# Altium PCB HotBed-24V.PcbDoc (part 3 of 3)
Units mil, origin at the board's own origin, x right, y up, seen from the top; angles counter-clockwise.
Board outline 5171.49 x 4724.57 mil, 2 copper layers (Top Layer, Bottom Layer); 4 components, 1 nets, 12 pads, 0 vias.
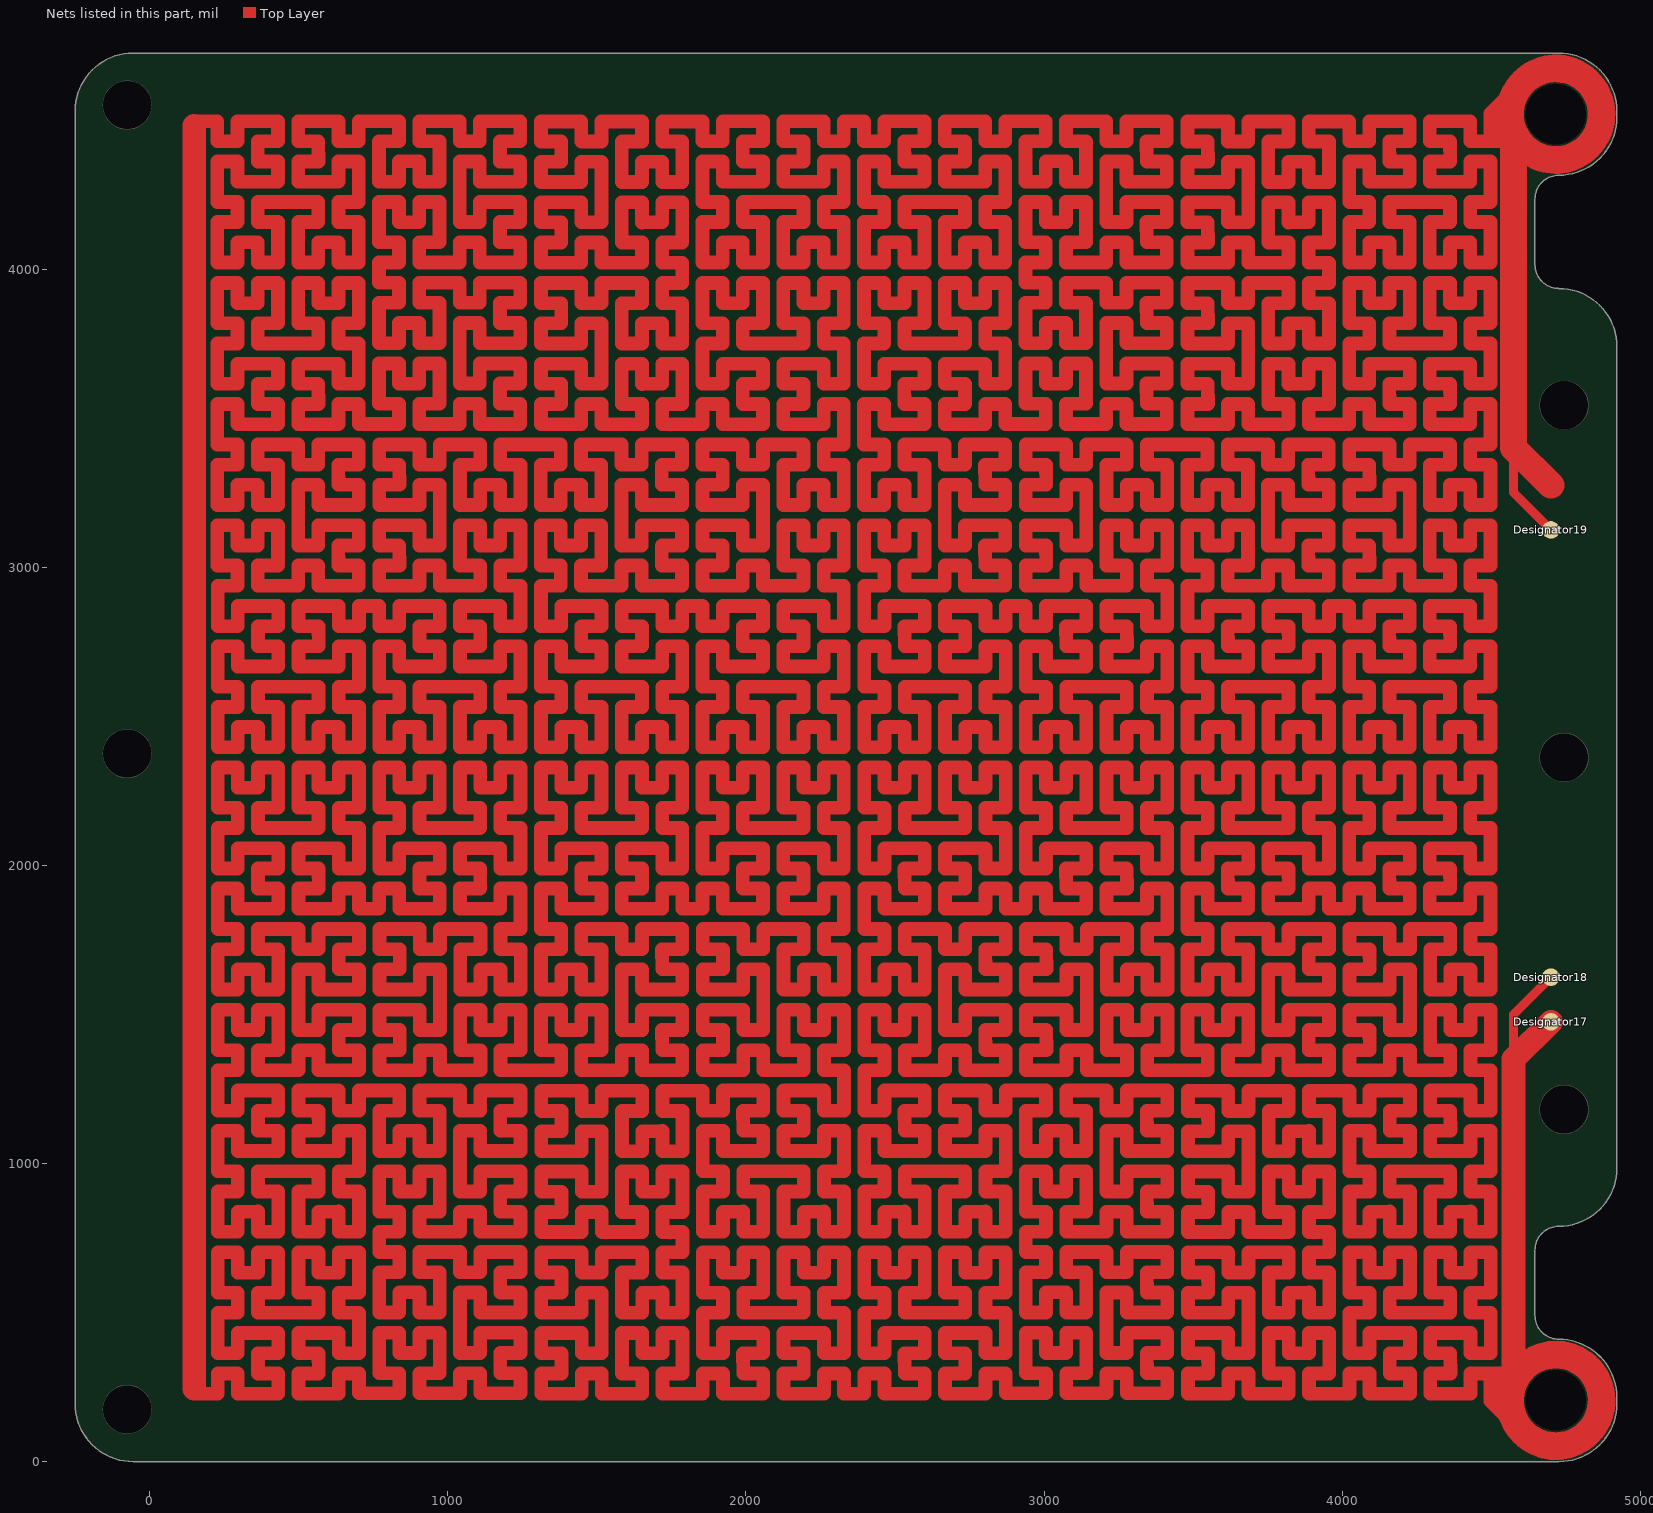
[diagram p3: the nets of this part, all layers, seen from the top]

## Nets (pads, with @x,y where several pads share a name; then routed paths per layer and width w, separated by ;. In a path a pad name is that pad's centre, name@x,y a point inside that pad or via, vN(x,y) a via of type N, cw(c..) or ccw(c..) an arc to the next point about the centre after c; other vN are vias at no path point) (continued)
Bed: (continued)
  Top Layer w46.06: 3887.36,1718.9 3887.8,1651.18 3955.51,1651.18 3955.51,1583.47 3820.08,1583.47 3820.08,1651.18 3752.36,1651.18 3752.36,1448.03 3820.08,1448.03 3820.08,1515.75 3955.51,1515.75 3955.51,1448.03 3887.8,1448.03 ; 3887.8,4359.84 3887.8,4292.13 3955.51,4292.13 3955.51,4427.56 3887.8,4427.56 3887.8,4495.28 4023.23,4495.28 4023.23,4428.54 4090.95,4428.54 4090.95,4496.26 4226.38,4496.26 4226.38,4428.54 4158.66,4428.54 ; 3888.78,1108.47 3888.78,1040.75 3956.5,1040.75 3956.5,1176.18 3888.78,1176.18 3888.78,1243.9 4024.21,1243.9 4024.21,1177.17 4091.93,1177.17 4091.93,1244.88 4227.36,1244.88 4227.36,1177.17 4159.65,1177.17 ; 4090.95,2260.2 4158.66,2260.63 4158.66,2328.35 4226.38,2328.35 4226.38,2192.91 4158.66,2192.91 4158.66,2125.2 4361.81,2125.2 4361.81,2192.91 4294.1,2192.91 4294.1,2328.35 4361.81,2328.35 4361.81,2260.63 ; 4090.95,2260.63 4090.95,2328.35 4023.23,2328.35 4023.23,2192.91 4090.95,2192.91 4090.95,2125.2 4023.23,2125.2 4023.23,1989.76 4090.95,1989.76 4090.95,2057.48 4226.38,2057.48 4226.38,1989.76 4158.66,1989.76 ; 4090.95,3005.51 4023.23,3005.51 4023.23,2937.8 4158.66,2937.8 4158.66,3005.51 4226.38,3005.51 4226.38,2937.8 4361.81,2937.8 4361.81,3005.51 4294.09,3005.51 4294.09,3140.95 4361.81,3140.95 4361.81,3073.23 ; 4090.95,3276.38 4023.23,3276.38 4023.23,3208.66 4158.66,3208.66 4158.66,3276.38 4226.38,3276.38 4226.38,3073.23 4158.66,3073.23 4158.66,3140.95 4023.23,3140.95 4023.23,3073.23 4090.95,3073.23 4091.38,3005.51 ; 4090.95,3885.39 4158.66,3885.83 4158.66,3953.54 4226.38,3953.54 4226.38,3818.11 4158.66,3818.11 4158.66,3750.39 4361.81,3750.39 4361.81,3818.11 4294.09,3818.11 4294.09,3953.54 4361.81,3953.54 4361.81,3885.83 ; 4090.95,3885.83 4090.95,3953.54 4023.23,3953.54 4023.23,3818.11 4090.94,3818.11 4090.94,3750.39 4023.23,3750.39 4023.23,3614.96 4090.94,3614.96 4090.94,3682.68 4226.38,3682.68 4226.38,3614.96 4158.66,3614.96 ; 4091.38,3276.38 4090.95,3344.09 4023.23,3344.09 4023.23,3411.81 4158.66,3411.81 4158.66,3344.09 4226.38,3344.09 4226.38,3411.81 4361.81,3411.81 4361.81,3344.1 4294.09,3344.1 4294.09,3208.66 4361.81,3208.66 4361.81,3276.38 4429.53,3276.81 ; 4091.93,634.02 4159.65,634.45 4159.65,702.17 4227.36,702.17 4227.36,566.73 4159.65,566.73 4159.65,499.02 4362.8,499.02 4362.8,566.73 4295.08,566.73 4295.08,702.17 4362.8,702.17 4362.8,634.45 ; 4091.93,634.45 4091.93,702.17 4024.21,702.17 4024.21,566.73 4091.93,566.73 4091.93,499.02 4024.21,499.02 4024.21,363.58 4091.93,363.58 4091.93,431.3 4227.36,431.3 4227.36,363.58 4159.65,363.58 ; 4091.93,1380.32 4024.21,1380.32 4024.21,1312.6 4159.65,1312.6 4159.65,1380.32 4227.36,1380.32 4227.36,1312.6 4362.8,1312.6 4362.8,1380.32 4295.08,1380.32 4295.08,1515.75 4362.8,1515.75 4362.8,1448.03 ; 4091.93,1651.18 4024.21,1651.18 4024.21,1583.47 4159.65,1583.47 4159.65,1651.18 4227.36,1651.18 4227.36,1448.03 4159.65,1448.03 4159.65,1515.75 4024.21,1515.75 4024.21,1448.03 4091.93,1448.03 4092.36,1380.32 ; 4092.36,1651.18 4091.93,1718.9 4024.21,1718.9 4024.21,1786.61 4159.65,1786.61 4159.65,1718.9 4227.36,1718.9 4227.36,1786.61 4362.8,1786.61 4362.8,1718.9 4295.08,1718.9 4295.08,1583.47 4362.8,1583.47 4362.8,1651.18 4430.51,1651.61 ; 4158.23,2802.36 4158.66,2734.65 4226.38,2734.65 4226.38,2666.93 4090.94,2666.93 4090.94,2734.65 4023.23,2734.65 4023.23,2599.21 4090.95,2599.21 4090.95,2531.5 4023.23,2531.5 4023.23,2396.06 4090.95,2396.06 4090.95,2463.78 4158.66,2464.21 ; 4158.23,4428.54 4158.66,4360.83 4226.38,4360.83 4226.38,4293.11 4090.95,4293.11 4090.95,4360.83 4023.23,4360.83 4023.23,4225.39 4090.95,4225.39 4090.95,4157.68 4023.23,4157.68 4023.23,4022.24 4090.95,4022.24 4090.95,4089.96 4158.66,4090.39 ; 4158.66,2463.78 4158.66,2396.06 4226.38,2396.06 4226.38,2531.5 4158.66,2531.5 4158.66,2599.21 4361.81,2599.21 4361.81,2531.5 4294.09,2531.5 4294.09,2396.06 4361.81,2396.06 4361.81,2463.78 4429.53,2464.21 ; 4158.66,4089.96 4158.66,4022.24 4226.38,4022.24 4226.38,4157.68 4158.66,4157.68 4158.66,4225.39 4361.81,4225.39 4361.81,4157.68 4294.1,4157.68 4294.1,4022.24 4361.81,4022.24 4361.81,4089.96 4429.53,4090.39 ; 4159.21,1177.17 4159.65,1109.45 4227.36,1109.45 4227.36,1041.73 4091.93,1041.73 4091.93,1109.45 4024.21,1109.45 4024.21,974.02 4091.93,974.02 4091.93,906.3 4024.21,906.3 4024.21,770.87 4091.93,770.87 4091.93,838.58 4159.65,839.02 ; 4159.65,838.58 4159.65,770.87 4227.36,770.87 4227.36,906.3 4159.65,906.3 4159.65,974.02 4362.8,974.02 4362.8,906.3 4295.08,906.3 4295.08,770.87 4362.8,770.87 4362.8,838.58 4430.51,839.02 ; 4361.81,1922.05 4294.1,1922.05 4294.1,1854.33 4429.53,1854.33 4429.53,1922.05 4497.24,1922.05 4497.24,1786.61 4430.51,1786.61 4430.51,1718.9 4498.23,1718.9 4498.23,1583.47 4430.51,1583.47 4430.51,1651.18 ; 4361.81,2260.2 4429.53,2260.63 4429.53,2328.35 4497.24,2328.35 4497.24,2192.91 4429.53,2192.91 4429.53,2125.2 4497.24,2125.2 4497.24,1989.76 4429.53,1989.76 4429.53,2057.48 4294.1,2057.48 4294.1,1989.76 4361.81,1989.76 4362.24,1922.05 ; 4361.81,2734.65 4294.09,2734.65 4294.09,2666.93 4429.53,2666.93 4429.53,2734.65 4497.24,2734.65 4497.24,2599.21 4429.53,2599.21 4429.53,2531.5 4497.24,2531.5 4497.24,2396.06 4429.53,2396.06 4429.53,2463.78 ; 4361.81,3072.8 4429.53,3073.23 4429.53,3140.95 4497.24,3140.95 4497.24,3005.51 4429.53,3005.51 4429.53,2937.8 4497.24,2937.8 4497.24,2802.36 4429.53,2802.36 4429.53,2870.08 4294.09,2870.08 4294.09,2802.36 4361.81,2802.36 4362.24,2734.65 ; 4361.81,3547.24 4294.09,3547.24 4294.09,3479.53 4429.53,3479.53 4429.53,3547.24 4497.24,3547.24 4497.24,3411.81 4429.53,3411.81 4429.53,3344.1 4497.24,3344.1 4497.24,3208.66 4429.53,3208.66 4429.53,3276.38 ; 4361.81,3885.39 4429.53,3885.83 4429.53,3953.54 4497.24,3953.54 4497.24,3818.11 4429.53,3818.11 4429.53,3750.39 4497.24,3750.39 4497.24,3614.96 4429.53,3614.96 4429.53,3682.68 4294.09,3682.68 4294.09,3614.96 4361.81,3614.96 4362.24,3547.24 ; 4361.81,4360.83 4294.1,4360.83 4294.1,4293.11 4429.53,4293.11 4429.53,4360.83 4497.24,4360.83 4497.24,4225.39 4429.53,4225.39 4429.53,4157.68 4497.24,4157.68 4497.24,4022.24 4429.53,4022.24 4429.53,4089.96 ; 4362.24,4360.83 4361.81,4428.54 4294.1,4428.54 4294.1,4496.26 4429.53,4496.26 4429.53,4428.54 4497.24,4428.54 ; 4362.8,295.87 4295.08,295.87 4295.08,228.15 4430.51,228.15 4430.51,295.87 4592.37,295.87 4599.82,295.87 4626.39,322.44 4625.54,323.28 ; 4362.8,634.02 4430.51,634.45 4430.51,702.17 4498.23,702.17 4498.23,566.73 4430.51,566.73 4430.51,499.02 4498.23,499.02 4498.23,363.58 4430.51,363.58 4430.51,431.3 4295.08,431.3 4295.08,363.58 4362.8,363.58 4363.23,295.87 ; 4362.8,1109.45 4295.08,1109.45 4295.08,1041.73 4430.51,1041.73 4430.51,1109.45 4498.23,1109.45 4498.23,974.02 4430.51,974.02 4430.51,906.3 4498.23,906.3 4498.23,770.87 4430.51,770.87 4430.51,838.58 ; 4362.8,1447.6 4430.51,1448.03 4430.51,1515.75 4498.23,1515.75 4498.23,1380.32 4430.51,1380.32 4430.51,1312.6 4498.23,1312.6 4498.23,1177.17 4430.51,1177.17 4430.51,1244.88 4295.08,1244.88 4295.08,1177.17 4362.8,1177.17 4363.23,1109.45 ; 4497.39,296.43 4497.39,235.56 ; 4539.56,277.73 4497.39,235.56 ; 4567.27,241.67 4572.2,236.74 ; 4570.34,156.04 4577.37,156.04 ; 4599.38,4429.39 4598.54,4428.54 4594.7,4428.54 4592.63,4428.54 4539.41,4428.54 ; 4605.56,94.56 4497.39,202.73 4497.39,235.56 ; 4649.41,4674.41 4497.24,4522.24 4497.24,4489.41 ; 4497.24,4428.54 4539.41,4428.54 ; 4497.24,4428.54 4497.24,4489.41 ; 4497.24,4489.41 4539.41,4447.24 4539.41,4428.54
  Top Layer w78.74: 149.41,243.9 149.41,4480.12
  Top Layer w80: 4599.82,295.87 4595.57,300.11 4575,320.68 4575,1350 Designator17.1@4700,1475
  Top Layer w90: 4594.7,4428.54 4593.51,4427.35 4575,4408.84 4575,3400 4700,3275
  Top Layer w92.52: 4594.7,4425.78 cw(c4716.34,4519.49) 4593.51,4427.35 cw(c4716.34,4519.49) 4592.63,4428.54 cw(c4716.34,4519.49) 4600.63,4418.55 ; 4566.43,237.99 cw(c4716.49,205.48) 4567.27,241.67 cw(c4716.49,205.48) 4592.37,295.87 cw(c4716.49,205.48) 4595.08,299.48 cw(c4716.49,205.48) 4595.57,300.11 cw(c4716.49,205.48) 4622.78,327.12 cw(c4716.49,205.48) 4716.49,51.94 cw(c4716.49,205.48) 4571.81,154.06 cw(c4716.49,205.48) 4571.12,156.04 cw(c4716.49,205.48) 4566.43,237.99
pads on no net: Designator16.1

## Keep-outs
Keep-Out Layer:
  lines w10: -250.08,4529.92 cw(c-55.59,4529.92) -55.59,4724.41 4726.77,4724.41 ; -250,4530 -250,194.41 ccw(c-55.51,194.41) -55.51,-0.08 ; -55.51,0 4726.85,0 ccw(c4726.85,194.49) 4921.34,194.49 ; 4646.5,490.62 4646.5,709.19 cw(c4726.42,709.19) 4726.42,789.11 ; 4646.65,490.47 ccw(c4726.57,490.47) 4726.57,410.55 cw(c4726.57,216.06) 4921.06,216.06 4921.06,194.77 ; 4726.42,3935.3 cw(c4726.42,4015.22) 4646.5,4015.22 4646.5,4234.5 cw(c4726.42,4234.5) 4726.42,4314.42 ; 4726.77,4724.49 cw(c4726.77,4530) 4921.26,4530 4921.26,4509.56 ; 4726.92,789.61 ccw(c4726.92,984.1) 4921.41,984.1 ; 4726.92,3934.8 cw(c4726.92,3740.31) 4921.41,3740.31 ; 4726.92,4314.92 ccw(c4726.92,4509.41) 4921.41,4509.41 ; 4921.26,984.25 4921.26,3740.16

## Silkscreen, mask and mechanical layers (free items; w line width, h text height)
Top Solder:
  circle w98.43: c4716.34,4519.49 r147.64
  circle w98.43: c4716.49,205.48 r147.64
  rectangle: -250,0 4921.26,4725
Drill Drawing:
  lines w10: -157.71,5352.5 -91.04,5352.5 -91.04,5419.17 -157.71,5419.17 -157.71,5352.5 ; -157.71,5569.17 -91.04,5569.17 -124.38,5502.5 -157.71,5569.17
  lines w15: -217.5,5307.5 12476.96,5307.5 ; -217.5,5607.5 12476.96,5607.5 ; 333.38,5157.5 333.38,5757.5 ; 813.26,5157.5 813.26,5757.5 ; 1962.92,5157.5 1962.92,5757.5 ; 2468.8,5157.5 2468.8,5757.5 ; 3202.6,5157.5 3202.6,5757.5 ; 4702.15,5157.5 4702.15,5757.5 ; 5292,5157.5 5292,5757.5 ; 6037.79,5157.5 6037.79,5757.5 ; 6687.62,5157.5 6687.62,5757.5 ; 7541.39,5157.5 7541.39,5757.5 ; 8874.99,5157.5 8874.99,5757.5 ; 10208.6,5157.5 10208.6,5757.5 ; 11074.36,5157.5 11074.36,5757.5 ; -217.5,5157.5 12476.96,5157.5 12476.96,5757.5 -217.5,5757.5 -217.5,5157.5
  text "Symbol" at -127.5,5652.5 h72
  text "Count" at 378.38,5652.5 h72
  text "Hole Size" at 858.26,5652.5 h72
  text "Plated" at 2007.92,5652.5 h72
  text "Hole Type" at 2513.8,5652.5 h72
  text "Drill Layer Pair" at 3247.6,5652.5 h72
  text "Via/Pad" at 4747.15,5652.5 h72
  text "Pad Shape" at 5337,5652.5 h72
  text "Template" at 6082.79,5652.5 h72
  text "Description" at 6732.62,5652.5 h72
  text "Hole Tolerance (+)" at 7586.39,5652.5 h72
  text "Hole Tolerance (-)" at 8919.99,5652.5 h72
  text "Hole Length" at 10253.6,5652.5 h72
  text "Routed Path Length" at 11119.36,5652.5 h72
  text "2" at 378.38,5502.5 h60
  text "202.76mil (5.150mm)" at 858.26,5502.5 h60
  text "PTH" at 2007.92,5502.5 h60
  text "Round" at 2513.8,5502.5 h60
  text "Top Layer - Bottom Layer" at 3247.6,5502.5 h60
  text "Pad" at 4747.15,5502.5 h60
  text "Rounded" at 5337,5502.5 h60
  text "c510h515" at 6082.79,5502.5 h60
  text "-" at 10253.6,5502.5 h60
  text "-" at 11119.36,5502.5 h60
  text "6" at 378.38,5352.5 h60
  text "161.42mil (4.100mm)" at 858.26,5352.5 h60
  text "PTH" at 2007.92,5352.5 h60
  text "Round" at 2513.8,5352.5 h60
  text "Top Layer - Bottom Layer" at 3247.6,5352.5 h60
  text "Pad" at 4747.15,5352.5 h60
  text "Rounded" at 5337,5352.5 h60
  text "c419h410" at 6082.79,5352.5 h60
  text "-" at 10253.6,5352.5 h60
  text "-" at 11119.36,5352.5 h60
  text "8 Total" at 378.38,5202.5 h60

## Dimensions
4921.41,984.1 to -250,194.41 on Mechanical 1
4726.77,4724.41 to 4726.85,0 on Mechanical 1